# Altium PCB LMAT_AMT_V3.PcbDoc (part 2 of 2)
Units mil, origin at the board's own origin, x right, y up, seen from the top; angles counter-clockwise.
Board outline 1437.01 x 1604.33 mil, 4 copper layers (Top Layer, PWR, GND, Bottom Layer), stack 61.89 mil thick; 106 components, 51 nets, 250 pads, 150 vias.
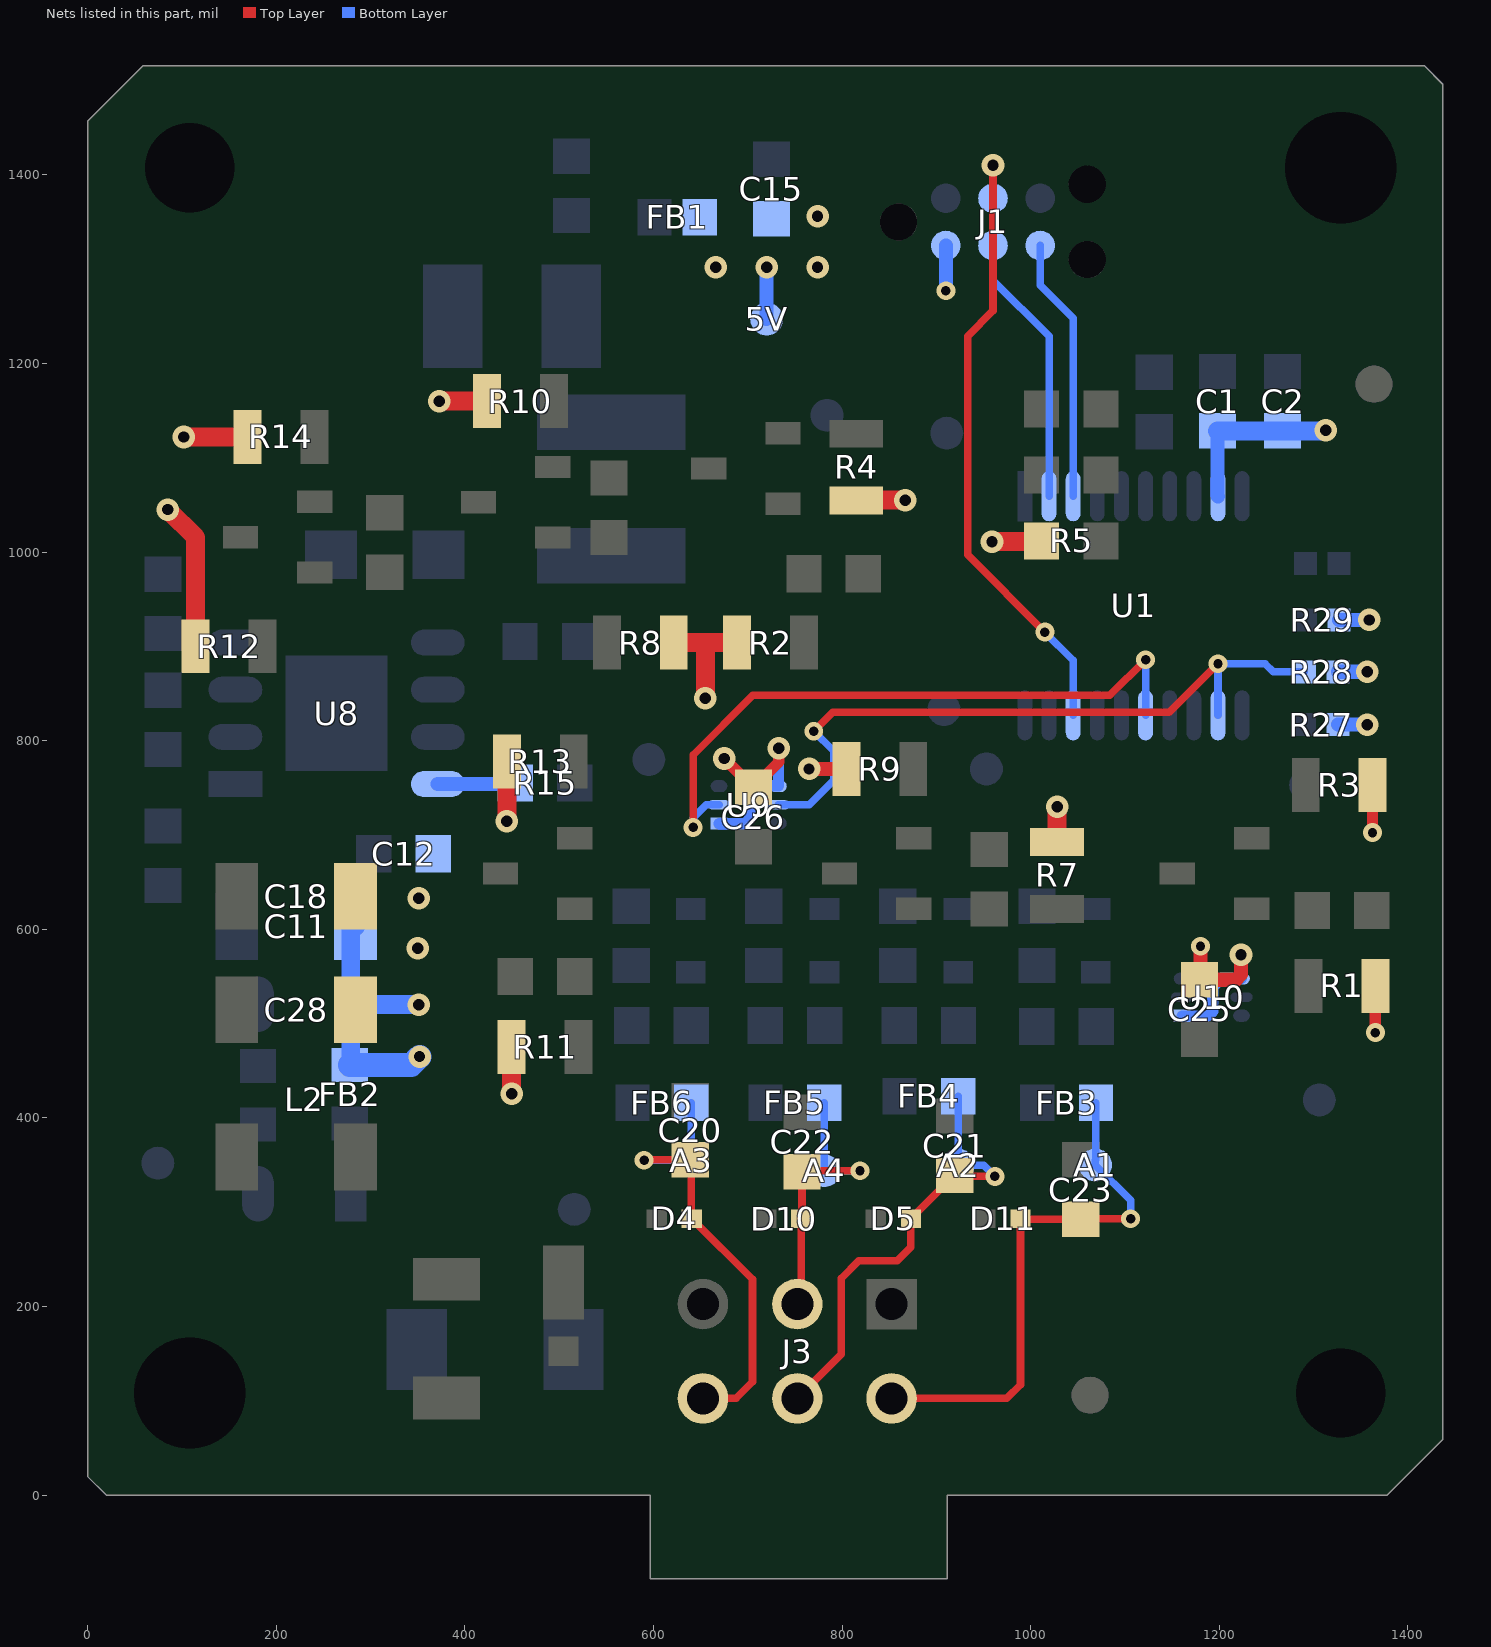
[diagram p4: the nets of this part, all layers, seen from the top]

## Via types
v1: diameter 24, hole 12, Top Layer to Bottom Layer, tented both sides, 128 vias
v2: diameter 20, hole 10, Top Layer to Bottom Layer, tented both sides, 22 vias

## Nets (pads, with @x,y where several pads share a name; then routed paths per layer and width w, separated by ;. In a path a pad name is that pad's centre, name@x,y a point inside that pad or via, vN(x,y) a via of type N, cw(c..) or ccw(c..) an arc to the next point about the centre after c; other vN are vias at no path point) (continued)
S3: R28.1 U1.12 U9.5 | length 738.3
  Top Layer w8: v2(770,810) 790,830 1147,830 v2(1198.57,881.57)
  Bottom Layer w8: U9.5@732.5,731.87 765,731.87 791,757.87 791,789 v2(770,810) ; U1.12@1198.57,826.86 v2(1198.57,881.57) 1248.43,881.57 1257,873 R28.1@1290.28,873
S4: U1.15 U9.2 | length 701.2
  Top Layer w8: v2(642,708) 642,784.77 705.23,848 1084,848 v2(1121.8,885.8)
  Bottom Layer w8: v2(642,708) 642,716.71 642.65,717.35 642,718 656,732 U9.2@669.5,732 ; U1.15@1121.8,826.86 v2(1121.8,885.8)
SIGNAL1: A1.1 C23.2 D11.2 FB3.2 J3.4 | length 574.5
  Top Layer w8: J3.4@852.5,102.5 974.5,102.5 989.18,117.18 D11.2@989.18,293 989.68,292.5 C23.2@1053,292.5 1053.5,293 v2(1106,293)
  Bottom Layer w8: FB3.2@1069.09,416 1069.09,355.44 1068.65,355 A1.1@1068.65,350 1106,312.65 v2(1106,293)
SIGNAL2: A2.1 C21.2 D5.2 FB4.2 J3.5 | length 489.7
  Top Layer w8: J3.5@752.5,102.5 799.27,149.27 799.27,229.69 817.86,248.27 858.27,248.27 873.03,263.03 D5.2@873.03,293 919.02,338.99 C21.2@919.48,338.99 920.47,338 v2(962,338)
  Bottom Layer w8: A2.1@922.91,350 A2.1@923,350 ; FB4.2@923.1,423 923.1,365.19 922.91,365 923,364.91 A2.1@923,350 ; v2(962,338) 950,350 A2.1@923,350
SIGNAL3: A3.1 C20.2 D4.2 FB6.2 J3.6 | length 482.4
  Top Layer w8: v2(590,355) 590.5,355.5 C20.2@639,355.5 ; C20.2@640,355.5 640,293.71 D4.2@640.71,293 705,228.71 705,120 687.5,102.5 J3.6@652.5,102.5
  Bottom Layer w8: v2(590,355) A3.1@640,355 640.1,355.1 FB6.2@640.1,416
SIGNAL4: A4.1 C22.2 D10.2 FB5.2 J3.2 | length 316.7
  Top Layer w8: J3.2@752.5,202.5 756.87,206.87 D10.2@756.87,293 757.5,293.63 C22.2@757.5,342.99 757.5,343.99 v2(819,344)
  Bottom Layer w8: A4.1@781,344 A4.1@781.1,344 ; FB5.2@781.1,416 A4.1@781.1,344 ; v2(819,344) 817,342 815,344 A4.1@781.1,344
SWIM: J1.3 U1.18 | length 675.7
  Top Layer w8: v1(960,1410) 960,1255.74 933,1228.74 933,997 v2(1015,915)
  Bottom Layer w8: J1.3@960,1375 v1(960,1410) ; v2(1015,915) 1045.02,884.98 U1.18@1045.02,826.86
UART_RX: J1.6 U1.3 | length 280.4
  Bottom Layer w8: J1.6@1010,1325 1010,1283 1045.02,1247.98 U1.3@1045.02,1059.14
UART_TX: J1.4 U1.2 | length 290.5
  Bottom Layer w8: J1.4@960,1325 960,1288 1019.43,1228.57 U1.2@1019.43,1059.14
VCC_5V: 5V.1 C1.1 C2.2 C15.1 C25.1 C26.1 FB1.2 J1.2 R1.1 R2.1 R3.1 R4.1 R5.2 R7.1 R8.1 R9.1 R10.1 R11.1 R12.1 R13.1 R14.1 R27.2 R28.2 R29.2 U1.9 U9.1 U9.4 U10.1 U10.4 | length 1650.1
  Top Layer w12: v1(675,781) 705.5,750.5 C26.1@706,750.5 733,777.5 v1(733,792) ; v2(1362.43,702.43) R3.1@1362.43,753 ; v2(1365.43,490.43) R1.1@1365.43,540
  Top Layer w15: v1(765,770) R9.1@804.57,770 ; v2(1180,582) 1180,547.5 C25.1@1179,546.5 1217.5,546.5 1223,552 v1(1223,573)
  Top Layer w20: v1(85,1045) 114.57,1015.43 R12.1@114.57,900 ; v1(102,1122) R14.1@169.57,1122 ; v1(373,1160) R10.1@423.57,1160 ; v1(444.57,714.57) R13.1@444.57,778 R13.1@444.57,794.43 ; v1(449.57,425.43) R11.1@449.57,475 ; R8.1@621.43,904 655,904 ; v1(655,845) 655,904 ; R2.1@688.57,904 655,904 ; R4.1@815,1054.57 815.43,1055 v1(867,1055) ; v1(959,1011) 1010.81,1011 R5.2@1011.5,1011.69 ; R7.1@1028,693 v1(1028,730)
  Bottom Layer w12: U9.1@669.5,712 697,712 702,717 702,743 711,752 U9.4@732.5,752 ; U9.4@732.5,751.87 U9.4@732.5,752 ; v1(733,792) 732.5,791.5 U9.4@732.5,752 ; U10.1@1160.5,508 1188,508 1193,513 1193,539 1202,548 1223.5,548 1223.18,548 1223,548.18 v1(1223,573)
  Bottom Layer w15: 5V.1@720,1247 v1(720,1302) ; v2(910,1277) J1.2@910,1325 ; C1.1@1198,1128.5 1198,1059.71 U1.9@1198.57,1059.14 ; R27.2@1325.72,817 v1(1357,817) ; R28.2@1325.72,873 v1(1357,873) ; R29.2@1326.72,928 v1(1359,928)
  Bottom Layer w20: C1.1@1198,1128.5 C2.2@1267,1128.5 1312.5,1128.5 v1(1313,1129)
  other v1: 666,1302 774,1302 774,1356
VCC_IN: C11.2 C12.1 C18.2 C28.2 FB2.2 L2.5 R15.2 U8.8 | length 378.4
  Bottom Layer w15: U8.8@371.28,754 R15.2@450.5,754
  Bottom Layer w20: FB2.2@278.01,456.1 279.08,457.17 L2.5@279.08,520.39 ; C11.2@283.99,603 279.08,598.09 L2.5@279.08,520.39 ; v1(351,520) 350.61,520.39 L2.5@279.08,520.39
  Bottom Layer w25: FB2.2@278.01,456.1 343.1,456.1 v1(352,465)
  other v1: 350,580 351,633
pads on no net: FID1.0 FID2.0 FID3.0 FID4.0 J1.0 U1.5 U1.6

## Polygon pours and split planes (outlines as drawn)
GND on Bottom Layer "GND_L04_P205" (solid, remove dead copper, pour order 205): 0,19.68 19.68,0 596.46,0 596.46,-88.58 911.42,-88.58 911.42,0 1377.95,0 1437.01,59.05 1437.01,1496.06 1417.32,1515.75 59.06,1515.75 0,1456.69
VCC_IN on Bottom Layer "VCC_IN_L04_P200" (solid, remove dead copper, pour order 200): 241.63,434.37 233,443 233,641 243.32,651.32 300,650 330.59,650 343,662.41 343,772 346,775 406.1,775 470,775 475,770 475,731 472,728 429,728 425,724 425,638.46 380,593.46 380,481 380,458 356.37,434.37
DGND on Bottom Layer "BOTTOM_LAYER-DGND_ALL" (solid, remove dead copper, pour order 204): 40.14,420 365,420 445,340 536.47,340 550,326.47 550,272.83 577.83,245 770,245 785,260 905,260 920,245 920,40.85 885,5.85 885,-50 870,-65 645,-65 625,-45 625,10 610,25 40,25 20,45 20,399.86
NetC17_2 on Bottom Layer "NETC17_2_L04_P199" (solid, remove dead copper, pour order 199): 244,278 283,238.44 443.44,238.44 460,255 460,383.4 421.4,422 255.32,422 244,411.34
VCC_5V on Bottom Layer "VCC_5V_L04_P198" (solid, remove dead copper, pour order 198): 799.47,1279 803,1282.53 803,1375.1 793.1,1385 634,1385 634,1290 645,1279
NetC14_2 on Bottom Layer "NETC14_2_L04_P202" (solid, remove dead copper, pour order 202): 455,1115 470,1100 649.88,1100 670,1120.12 670,1185 615,1240 615,1385 465,1385 455,1375 455,1160
NetC16_2 on Bottom Layer "NETC16_2_L04_P203" (solid, remove dead copper, pour order 203): 687,1050 700,1037 700,907 630.74,837.74 612.74,837.74 335,837.74 335,875 498,875 498,928 484,942 364,942 345,961 345,1038 357,1050
NetD6_2 on Bottom Layer "NETD6_2_L04_P201" (solid, remove dead copper, pour order 201): 450,84 450,69 461,58 587,58 601,72 601,123 617,139 689,139 700,150 700,235 688,247 506,247 450,191
GND on Top Layer "GND_L01_P197" (solid, remove dead copper, pour order 197): 0,19.68 19.68,0 596.46,0 596.46,-88.58 911.42,-88.58 911.42,0 1377.95,0 1437.01,59.05 1437.01,1496.06 1417.32,1515.75 59.06,1515.75 0,1456.69
DGND on Top Layer "TOP_LAYER-DGND_ALL" (solid, remove dead copper, pour order 196): 44.14,424 361,424 445,340 536.47,340 550,326.47 550,272.83 577.83,245 770,245 785,260 905,260 920,245 920,40.85 885,5.85 885,-50 870,-65 645,-65 625,-45 625,10 610,25 40,25 20,45 20,399.86
NetC17_2 on Top Layer "NETC17_2_L01_P195" (solid, remove dead copper, pour order 195): 319,187 310,196 310,268 296,282 249,282 242,289 242,413.96 255.2,427.16 365.84,427.16 448,345 507,345 538,314 538,284 537,195 529,187 405,187 352,187
NetD6_2 on Top Layer "NETD6_2_L01_P193" (solid, remove dead copper, pour order 193): 601,95 601,72 590,61 448,61 444,65 444,156 457,169 589,169 601,157
VCC_IN on Top Layer "VCC_IN_L01_P194" (solid, remove dead copper, pour order 194): 372,456 362,446 263,446 242,467 242,659 242,686.57 246.43,691 366,691 372,685 372,641 372,492
VCC_5V on PWR (split plane): 1409,1495.65 1416.91,1487.74 1416.91,67.38 1369.63,20.1 926.49,20.1 926.49,238.58 926.2,241.52 925.34,244.35 923.95,246.96 922.08,249.24 904.66,266.66 902.37,268.53 899.77,269.93 896.94,270.78 894,271.07 545.24,271.07 385.66,430.66 383.37,432.53 380.77,433.93 377.94,434.78 375,435.07 20.1,435.07 20.1,1448.37 67.38,1495.65
DGND on PWR (split plane): 528.34,245.34 530.63,243.47 533.23,242.07 536.06,241.22 539,240.93 887.76,240.93 896.35,232.34 896.35,13.16 894.71,11.17 892.85,7.69 892.05,5.06 891.71,3.92 891.32,0 891.32,-68.49 616.55,-68.49 616.55,0 616.17,3.92 615.82,5.06 615.02,7.69 613.17,11.17 610.67,14.21 607.62,16.71 604.15,18.57 601.52,19.36 600.38,19.71 596.46,20.1 28.01,20.1 20.1,28.01 20.1,404.93 368.76,404.93
GND on GND (split plane): 1409,1495.65 1416.91,1487.74 1416.91,67.38 1369.63,20.1 926.49,20.1 926.49,238.58 926.2,241.52 925.34,244.35 923.95,246.96 922.08,249.24 904.66,266.66 902.37,268.53 899.77,269.93 896.94,270.78 894,271.07 545.24,271.07 385.66,430.66 383.37,432.53 380.77,433.93 377.94,434.78 375,435.07 20.1,435.07 20.1,1448.37 67.38,1495.65
DGND on GND (split plane): 528.34,245.34 530.63,243.47 533.23,242.07 536.06,241.22 539,240.93 887.76,240.93 896.35,232.34 896.35,13.16 894.71,11.17 892.85,7.69 892.05,5.06 891.71,3.92 891.32,0 891.32,-68.49 616.55,-68.49 616.55,0 616.17,3.92 615.82,5.06 615.02,7.69 613.17,11.17 610.67,14.21 607.62,16.71 604.15,18.57 601.52,19.36 600.38,19.71 596.46,20.1 28.01,20.1 20.1,28.01 20.1,404.93 368.76,404.93

## Keep-outs
Keep-Out Layer:
  lines w5: 0,222.5 cw(c108.21,108.21) 222.5,0 ; 0,1293 ccw(c108.27,1407.48) 222.39,1516.12 ; 1214.27,1515.75 ccw(c1328.52,1407.26) 1437,1293 ; 1215,0 cw(c1328.54,108.72) 1437.01,222.5 ; 59.06,1515.75 1417.32,1515.75 1437.01,1496.06 1437.01,59.05 1377.95,0 911.42,0 911.42,-88.58 596.46,-88.58 596.46,0 19.68,0 0,19.68 0,1456.69 59.06,1515.75 ; 59.06,1515.75 59.06,1515.75
  text "'.Layer_Name'" at 15860,-9491 h150

## Other copper
Top Layer:
  pour cut-out: 379.79,449 379.79,420 392.5,420 392.5,449
  pour cut-out: 1037.79,1024.9 1037.79,1011.9 1049.61,1011.9 1049.61,1024.9
  pour cut-out: 1035.79,1096.9 1035.79,1083.9 1047.61,1083.9 1047.61,1096.9
  pour cut-out: 1036.79,1165.9 1036.79,1152.9 1048.61,1152.9 1048.61,1165.9
  pour cut-out: 223.33,998.45 258,998.45 258,1035.55 222.74,1035.55
  pour cut-out: 218.89,478.68 218.9,369.8 233.82,369.8 233.81,478.68
  pour cut-out: 660.84,700.2 676.32,700.2 676.32,713.13 660.84,713.13
  pour cut-out: 555,271.57 656.5,271.57 656.5,222.43 555,222.43
  pour cut-out: 918.47,281.07 940,281.07 940,259.42 918.47,259.42
  pour cut-out: 776.24,270 825,270 825,244.52 776.24,244.52
  pour cut-out: 690,264.74 738.76,264.74 738.76,239.25 690,239.26
  pour cut-out: 1210,534.74 1280,534.73 1280,509.25 1210,509.26
  pour cut-out: 416.37,167.9 423.61,167.9 423.61,135.28 416.37,135.28
  text "'.Layer_Name'" at 15625,-9501 h150
Bottom Layer:
  pour cut-out: 232.83,654 232.83,637.48 276,637.48 276,654
  pour cut-out: 190.84,566.9 190.84,557.48 219,557.48 219,566.9
  pour cut-out: 1333,1093 1341,1093 1341,1070 1333,1070
  pour cut-out: 217,445 248.58,445 248.58,362 217,362
  pour cut-out: 1243,789 1383,789 1383,916 1243,916
  pour cut-out: 394.38,459.12 404,449.5 404,422.5 376,422.5 376,451.5
  pour cut-out: 602.7,758.96 602.7,733.15 621,733.15 621,758.96
  pour cut-out: 480.39,333 546,333 546,259.42 480.39,259.42
  pour cut-out: 1153,1175 1245,1175 1245,1152 1153,1152
  pour cut-out: 566,468 658,468 658,445 566,445
  pour cut-out: 709,468 801,468 801,445 709,445
  pour cut-out: 850,472 942,472 942,449 850,449
  pour cut-out: 1003,467 1099,467 1099,384 1003.01,384
  text "'.Layer_Name'" at 15652,-9500 h150
PWR (plane layer: these items are gaps in the copper):
  pour cut-out: 717.44,792 ccw(c733,792) 733,776.44 ccw(c733,792) 748.56,792 ccw(c733,792) 733,807.56 ccw(c733,792)
  pour cut-out: 1206.82,573.05 ccw(c1222.37,573.05) 1222.37,557.49 ccw(c1222.37,573.05) 1237.93,573.05 ccw(c1222.37,573.05) 1222.37,588.6 ccw(c1222.37,573.05)
  lines w30: 0,420 375,420 539,256 894,256 911.42,238.58 911.42,0
  text "'.Layer_Name'" at 15653,-9501 h150
GND (plane layer: these items are gaps in the copper):
  lines w30: 0,420 375,420 539,256 894,256 911.42,238.58 911.42,0
  lines w40: 1345,1425 1345,1430
  text "'.Layer_Name'" at 15640,-9503 h150

## Silkscreen, mask and mechanical layers (free items; w line width, h text height)
Top Overlay:
  text "LMAT_AMT_V3" at 250,1329 h80
  text "'.Layer_Name'" at 15755,-9491 h150
Bottom Overlay:
  lines w8: 809,389 815,383 815,376.54 ; 948,392 954,386 954,381 ; 1105,390 1112,383 1112,377
  text "PROG_CONN" at 1085,1177 h40
  text "'.Layer_Name'" at 15795,-9476 h150
Top Paste:
  text "'.Layer_Name'" at 15940,-9481 h150
Bottom Paste:
  text "'.Layer_Name'" at 15940,-9501 h150
Top Solder:
  text "'.Layer_Name'" at 16030,-9481 h150
Bottom solder:
  region: 1239.09,560 1208,560 1208,498 1239.09,498
  region: 1176,558 1144,558 1144,499 1176,499
  rectangle: 716,701 748,761.18
  rectangle: 652,701 684.87,761
Drill Guide:
  text "'.Layer_Name'" at 16070,-9496 h150
Fabrication Notes:
  drawing of 347 lines, arcs and shapes, not listed
  text "Layer" at 5132.5,6345.5 h60
  text "Name" at 5542.41,6345.5 h60
  text "Material" at 6472.16,6345.5 h60
  text "Thickness" at 7331.92,6345.5 h60
  text "Constant" at 7981.76,6345.5 h60
  text "Board Layer Stack" at 8551.62,6345.5 h60
  text "1" at 5132.5,6225.5 h60
  text "Top Overlay" at 5542.41,6225.5 h60
  text "2" at 5132.5,6105.5 h60
  text "Top Solder" at 5542.41,6105.5 h60
  text "Solder Resist" at 6472.16,6105.5 h60
  text "0.020mm" at 7331.92,6105.5 h60
  text "3.5" at 7981.76,6105.5 h60
  text "3" at 5132.5,5985.5 h60
  text "Top Layer" at 5542.41,5985.5 h60
  text "Copper" at 6472.16,5985.5 h60
  text "0.035mm" at 7331.92,5985.5 h60
  text "4" at 5132.5,5865.5 h60
  text "Dielectric 1" at 5542.41,5865.5 h60
  text "PP-006" at 6472.16,5865.5 h60
  text "0.128mm" at 7331.92,5865.5 h60
  text "4.2" at 7981.76,5865.5 h60
  text "5" at 5132.5,5745.5 h60
  text "Dielectric 2" at 5542.41,5745.5 h60
  text "0.088mm" at 7331.92,5745.5 h60
  text "4.2" at 7981.76,5745.5 h60
  text "6" at 5132.5,5625.5 h60
  text "PWR" at 5542.41,5625.5 h60
  text "Copper" at 6472.16,5625.5 h60
  text "0.035mm" at 7331.92,5625.5 h60
  text "7" at 5132.5,5505.5 h60
  text "Dielectric 3" at 5542.41,5505.5 h60
  text "FR-4" at 6472.16,5505.5 h60
  text "1.000mm" at 7331.92,5505.5 h60
  text "4.2" at 7981.76,5505.5 h60
  text "8" at 5132.5,5385.5 h60
  text "GND" at 5542.41,5385.5 h60
  text "Copper" at 6472.16,5385.5 h60
  text "0.035mm" at 7331.92,5385.5 h60
  text "9" at 5132.5,5265.5 h60
  text "Dielectric 4" at 5542.41,5265.5 h60
  text "PP-006" at 6472.16,5265.5 h60
  text "0.088mm" at 7331.92,5265.5 h60
  text "4.2" at 7981.76,5265.5 h60
  text "10" at 5132.5,5145.5 h60
  text "Dielectric 5" at 5542.41,5145.5 h60
  text "0.128mm" at 7331.92,5145.5 h60
  text "4.2" at 7981.76,5145.5 h60
  text "11" at 5132.5,5025.5 h60
  text "Bottom Layer" at 5542.41,5025.5 h60
  text "Copper" at 6472.16,5025.5 h60
  text "0.035mm" at 7331.92,5025.5 h60
  text "12" at 5132.5,4905.5 h60
  text "Bottom solder" at 5542.41,4905.5 h60
  text "Solder Resist" at 6472.16,4905.5 h60
  text "0.020mm" at 7331.92,4905.5 h60
  text "3.5" at 7981.76,4905.5 h60
  text "13" at 5132.5,4785.5 h60
  text "Bottom Overlay" at 5542.41,4785.5 h60
  text "Total Pcb Thickness = 1.612MM  +/- 10%" at 5255.55,4296.24 h100
  text "Finished cu Thickness: 1 OZ" at 5656.3,4045.3 h100
  text "FABRICATION NOTES:" at -10970.2,697.07 h80
  text "1. LATEST VERSION OF ALL REFERENCED IPC SPECIFICATIONS TO BE USED." at -10970.2,497.07 h70
  text "2. ALL MULTILAYER PC BOARDS MUST BE PRODUCED IN ACCORDANCE IPC-A-600, CLASS 2." at -10970.2,297.14 h70
  text "3. INSPECT ALL MULTILAYER PC BOARDS IN ACCORDANCE WITH IPC-6012, CLASS 2." at -10970.2,97.14 h70
  text "4. MATERIAL:  THIN LAMINATE, FR4 COPPER CLAD 1 OZ PER LAYER" at -10970.2,-102.86 h70
  text "1.6 MM +/-10% THICK, COLOR GREEN," at -10772.2,-237.93 h70
  text "MINIMUM CTI (PER IEC 60112 USING SOLUTION A) = 175." at -10772.2,-387.93 h70
  text "5. FABRICATE BOARDS USING THE GERBER FILES CONTAINED IN FABRICATION FOLDER." at -10970.2,-602.86 h70
  text "6. DRILL DATA ARE CONTAINED IN THE FABRICATION FOLDER." at -10970.2,-812.86 h70
  text "7. ALL HOLE DIAMETERS MUST BE PER DRILL CHART +/-0.003 INCHES TOLERANCE," at -10970.2,-1017.86 h70
  text "UNLESS OTHERWISE SPECIFIED." at -10770.2,-1164.93 h70
  text "8. PLATED-THRU HOLES TO HAVE COPPER WALL THICKNESS NOT LESS THAN 0.001 INCHES." at -10970.2,-1367.86 h70
  text "THICKNESS TO BE DETERMINED BY IPC-6012, CLASS 2." at -10790.2,-1512.93 h70
  text "9. SURFACE FINISH PROCESS MUST BE HAL LEAD-FREE" at -10970.2,-1717.86 h70
  text "10. SILKSCREEN BOTH SIDES WITH WHITE EPOXY NON-CONDUCTIVE INK." at -10970.2,-1892.93 h70
  text "SILKSCREEN MAY BE TRIMMED OFF ANY SOLDERED ENTITY." at -10714.2,-2042.93 h70
  text "11. SOLDER MASK BOTH SIDES WITH LIQUID PHOTO IMAGEABLE SOLDER MASK (LPI)," at -10970.2,-2242.93 h70
  text "MEETING IPC-SM-840, CLASS 2, HIGH PERFORMANCE SPECIFICATIONS." at -10720.2,-2380.93 h70
  text "FINISH: SOLDER MASK OVER BARE COPPER (SMOBC)." at -10720.2,-2535.93 h70
  text "12. WARP AND TWIST SHALL BE LESS THAN 0.0075 INCH PER INCH." at -10970.2,-2752.93 h70
  text "INSPECT PER IPC-TM-650, 2.4.22." at -10714.2,-2894.93 h70
  text "13. ALL BOARDS MUST BE DATE CODED USING A FOUR DIGIT CODE," at -10970.2,-3087.93 h70
  text "YEAR FOLLOWED BY WEEK (e.g. 0449 = 49TH WEEK OF 2004)." at -10714.2,-3229.93 h70
  text "14. ALL DIMENSIONS AND HOLE DIAMETERS APPLY TO THE FINISHED BOARD." at -10970.2,-3442.93 h70
  text "15. PADS MUST BE FINISHED TO WITHIN +/-0.0015 INCHES OF THE MINOR DIMENSION (PAD WIDTH)" at -10970.2,-3637.93 h70
  text "AND +/-0.002 INCHES OF THE MAJOR DIMENSION (PAD LENGTH)." at -10711.2,-3789.93 h70
  text "16. FIDUCIALS MUST BE FREE OF ANY MARKINGS." at -10970.2,-3972.93 h70
  text "17. BARE BOARD TO BE ELECTRICALLY TESTED IN ACCORDANCE WITH IPC-ET-652 AND MARKED AS TESTED." at -10970.2,-4177.93 h70
  text "18. BOARDS SHALL BE UL-RECOGNIZED AND UL-MARKED. UL FIRE RETARDANT RATING 94V-0 OR HIGHER." at -10970.2,-4377.93 h70
  text "19. ROHS: ALL MATERIALS MUST BE COMPLIANT WITH THE ROHS DIRECTIVE." at -10970.2,-4577.93 h70
  text "20. EACH PCB MUST BE INDIVIDUALLY BAGGED." at -10995,-4790 h70
  text "21. ALL VIA MUST BE TENTED." at -10990,-5010 h70
Board Outlines:
  the board outline again, w5
  text "'.Layer_Name'" at 15648,-9508 h150
Dimensions:
  lines w5: 59.06,1515.75 59.06,1515.75 ; 59.06,1515.75 0,1456.69 0,19.68 19.68,0 596.46,0 596.46,-88.58 911.42,-88.58 911.42,0 1377.95,0 1437.01,59.05 1437.01,1496.06 1417.32,1515.75 59.06,1515.75
  lines w8: 0,-50 0,7.18
  text "'.Layer_Name'" at 15651,-9503 h150
Assembly Notes:
  text "ASSEMBLY NOTES:" at -11451.14,5359.58 h80
  text "CAUTION :" at -11457.14,5212.99 h80
  text "COMPONENTS ARE SUBJECT TO DAMAGE BY STATIC ELECTRICITY." at -10855.14,5204.99 h80
  text "1. SERIALIZATION PER #900-984." at -10871.14,5053.99 h80
  text "2.  REFER BOM FOR COMPONENT PLACEMENT." at -10889.14,4868.99 h80
  text "3. MARK WITH SERIAL NUMBER ON A STICKER PASTED." at -10892.14,4679.99 h80
  text "4.  LABELS SHALL NOT TO BE PLACED OVER EXPOSED COPPER." at -10886.14,4493.33 h80
  text "5. MANUFACTURE PER TS 16469 STANDARD." at -10881.14,4326.99 h80
  text "6. BOARD MUST BE CLEANED EVEN IF USING NO CLEAN FLUX." at -10881.14,4161.99 h80
  text "7.  ASSEMBLY SHALL BE ELECTRICALLY TESTED." at -10876.14,3996.99 h80
  text "8.  SOLDER AND ASSEMBLE AS PER INDUSTRY WORKMANSHIP STANDARDS." at -10876.14,3826.99 h80
  text "9. ASSEMBLY MUST BE ROHS COMPLIANT." at -10886.14,3661.99 h80
1MM:
  lines w5: -13895.07,-5183.7 -13595.07,-5183.7 ; -13895.07,-183.7 -13595.07,-183.7 ; -13895.07,4816.3 -13595.07,4816.3 ; -9895.07,-10183.7 -9895.07,-9883.7 ; -9895.07,9516.3 -9895.07,9816.3 ; -5895.07,-10183.7 -5895.07,-9883.7 ; -5895.07,9516.3 -5895.07,9816.3 ; -1895.07,-10183.7 -1895.07,-9883.7 ; -1895.07,9516.3 -1895.07,9816.3 ; 39.37,1439.69 39.37,78.74 78.74,39.37 629.92,39.37 629.92,-39.37 885,-39.37 885,39.37 1377.95,39.37 1397.64,59.06 1397.64,1452.36 1373.62,1476.38 80.87,1476.38 75.55,1476.38 39.37,1440.2 ; 2104.93,-10183.7 2104.93,-9883.7 ; 2104.93,9516.3 2104.93,9816.3 ; 6104.93,-10183.7 6104.93,-9883.7 ; 6104.93,9516.3 6104.93,9816.3 ; 10104.93,-10183.7 10104.93,-9883.7 ; 10104.93,9516.3 10104.93,9816.3 ; 11904.93,-9883.7 13304.93,-9883.7 17804.93,-9883.7 ; 14104.93,-10183.7 14104.93,-9883.7 ; 14104.93,9516.3 14104.93,9816.3 ; 17804.93,-8683.7 17804.93,-9883.7 ; 17804.93,-5183.7 18104.93,-5183.7 ; 17804.93,-183.7 18104.93,-183.7 ; 17804.93,4816.3 18104.93,4816.3 ; 17804.93,-9883.7 17804.93,9516.3 -13595.07,9516.3 -13595.07,-9883.7 17804.93,-9883.7 ; -13895.07,-10183.7 18104.93,-10183.7 18104.93,9816.3 -13895.07,9816.3 -13895.07,-10183.7
  lines w10: 10500.93,-9879.8 11800.93,-9879.8 17800.93,-9879.8 17800.93,-8379.8 ; 10500.93,-8010.15 17795.93,-8010.15 ; 11800.93,-9579.8 14200.93,-9579.8 17800.93,-9579.8 ; 11800.93,-9279.8 14200.93,-9279.8 17795.65,-9279.8 ; 11800.93,-8979.8 14200.93,-8979.8 17800.93,-8979.8 ; 11800.93,-8679.8 14200.93,-8679.8 ; 12800.93,-9879.8 12800.93,-9579.8 ; 13200.93,-9279.8 13200.93,-8379.8 ; 14200.93,-9879.8 14200.93,-8379.8 ; 15100.93,-9879.8 15100.93,-9579.8 ; 15500.93,-9879.8 15500.93,-9579.8 ; 17400.93,-9879.8 17400.93,-9579.8 ; 10500.93,-8379.8 11800.93,-8379.8 ; 10500.93,-8379.8 10500.93,-9881.7 11800.93,-9881.7 11800.93,-8379.8 ; 10500.93,-8379.8 10500.93,-7600.15 17800.93,-7600.15 17800.93,-8379.8 ; 11800.93,-8379.8 17800.93,-8379.8
  text "1" at -11913.07,9626.3 h70
  text "2" at -7918.07,9626.3 h70
  text "3" at -3923.07,9626.3 h70
  text "4" at 77.94,9626.3 h70
  text "5" at 4076.27,9626.3 h70
  text "6" at 8074.61,9626.3 h70
  text "7" at 12076.27,9626.3 h70
  text "8" at 16071.27,9626.3 h70
  text "A" at -13770.07,7228.3 h70
  text "A" at 17929.93,7228.3 h70
  text "B" at -13770.07,2228.3 h70
  text "B" at 17929.93,2228.3 h70
  text "C" at -13770.07,-2771.7 h70
  text "C" at 17929.93,-2771.7 h70
  text "D" at -13770.07,-7771.7 h70
  text "D" at 17929.93,-7771.7 h70
  text "THE INFORMATION CONTAINED IN THIS DOCUMENT IS PROPRIETARY OF CUSTOMER." at 17641.19,-7784.52 h75
  text "ANY PRODUCTION IN PART OR WHOLE WITHOUT PRIOR WRITTEN AUTHORIZATION OF CUSTOMER IS PROHIBITED." at 17649.33,-7938.02 h75
  text "CUSTOMER:  LUMAX" at 16081.33,-8251.02 h100
  text "DATE" at 14105.93,-8484.8 h45
  text "Drawn By: Harshavardhan K" at 13115.93,-8489.8 h45
  text "UNLESS OTHERWISE" at 11756.33,-8561.02 h70
  text "Design Partner:" at 17615.93,-8610.8 h100
  text "'.Print_Date'" at 14120.93,-8634.8 h70
  text "SPECIFIED:" at 11730.93,-8669.8 h70
  text "DATE" at 14110.93,-8784.8 h45
  text "ALL DIMENSIONS ARE" at 11766.33,-8796.02 h70
  text "Designed By : Vijendra N" at 13113.93,-8799.8 h45
  text "EmbDes Technologies Pvt. Ltd." at 17615.93,-8829.52 h100
  text "'.Print_Date'" at 14120.93,-8934.8 h70
  text "IN INCHES" at 11708.93,-8937.8 h70
  text "DATE" at 14120.93,-9074.8 h45
  text "Checked By : Uday Kumar K" at 13113.93,-9079.8 h45
  text "TOLERANCES" at 11658.93,-9087.8 h70
  text "PROJECT NAME:    LMAT_AMT_V2" at 17615.93,-9177.02 h80
  text "(DECIMAL):" at 11708.93,-9187.8 h70
  text "'.Print_Date'" at 14120.93,-9224.8 h70
  text ".X +/-0.1" at 11708.93,-9337.8 h70
  text "REF ID" at 14123.93,-9396.02 h45
  text ".XX +/-0.01" at 11701.33,-9446.02 h70
  text "'.Layer_Name'" at 15045,-9476 h150
  text "LAYER NAME:" at 17615.93,-9486.02 h80
  text "ASSY BOTTOM" at 16642.99,-9524.07 h150
  text ".XXX +/-0.005" at 11696.33,-9556.02 h70
  text "Scale" at 12711.33,-9681.02 h45
  text "Size" at 15385.93,-9684.8 h45
  text "REV" at 17685.93,-9684.8 h45
  text "ANGLES +/-0.5" at 11558.93,-9687.8 h70
  text "Sheet     of" at 14955.93,-9689.8 h45
  text "DWG NO" at 17336.33,-9691.02 h45
  text "DO NOT SCALE" at 14036.33,-9716.02 h70
  text "1:1" at 12385.93,-9784.8 h70
  text "1" at 14497.93,-9799.8 h70
  text "1" at 14891.33,-9801.02 h70
  text "D" at 15309.93,-9808.7 h90
  text "1.0" at 17690.93,-9809.8 h70
  text "DRAWING" at 14036.33,-9841.02 h70
  text "1" at -11913.07,-10068.7 h70
  text "2" at -7918.07,-10068.7 h70
  text "3" at -3923.07,-10068.7 h70
  text "4" at 77.94,-10068.7 h70
  text "5" at 4076.27,-10068.7 h70
  text "6" at 8074.61,-10068.7 h70
  text "7" at 12076.27,-10068.7 h70
  text "8" at 16071.27,-10068.7 h70
Bottom Assembly:
  text "'.Layer_Name'" at 15655,-9486 h40
Template:
  lines w5: -13860.39,-5193.39 -13560.39,-5193.39 ; -13860.39,-193.39 -13560.39,-193.39 ; -13860.39,4806.61 -13560.39,4806.61 ; -9860.39,-10193.39 -9860.39,-9893.39 ; -9860.39,9506.61 -9860.39,9806.61 ; -5860.39,-10193.39 -5860.39,-9893.39 ; -5860.39,9506.61 -5860.39,9806.61 ; -1860.39,-10193.39 -1860.39,-9893.39 ; -1860.39,9506.61 -1860.39,9806.61 ; 2139.61,-10193.39 2139.61,-9893.39 ; 2139.61,9506.61 2139.61,9806.61 ; 6139.61,-10193.39 6139.61,-9893.39 ; 6139.61,9506.61 6139.61,9806.61 ; 10139.61,-10193.39 10139.61,-9893.39 ; 10139.61,9506.61 10139.61,9806.61 ; 11939.61,-9893.39 13339.61,-9893.39 17839.61,-9893.39 ; 14139.61,-10193.39 14139.61,-9893.39 ; 14139.61,9506.61 14139.61,9806.61 ; 17839.61,-8693.39 17839.61,-9893.39 ; 17839.61,-5193.39 18139.61,-5193.39 ; 17839.61,-193.39 18139.61,-193.39 ; 17839.61,4806.61 18139.61,4806.61 ; 17839.61,-9893.39 17839.61,9506.61 -13560.39,9506.61 -13560.39,-9893.39 17839.61,-9893.39 ; -13860.39,-10193.39 -13860.39,9806.61 18139.61,9806.61 18139.61,-10193.39 -13860.39,-10193.39
  lines w10: 10534.51,-9891.39 11834.51,-9891.39 ; 10534.51,-8021.73 17829.51,-8021.73 ; 11829.51,-9891.39 10534.91,-9891.39 10534.51,-9890.98 10534.51,-8391.39 ; 11834.51,-9591.39 14234.51,-9591.39 17834.51,-9591.39 ; 11834.51,-9291.39 14234.51,-9291.39 17829.23,-9291.39 ; 11834.51,-8991.39 14234.51,-8991.39 17834.51,-8991.39 ; 11834.51,-8691.39 14234.51,-8691.39 ; 12834.51,-9891.39 12834.51,-9591.39 ; 13234.51,-9291.39 13234.51,-8391.39 ; 14234.51,-9891.39 14234.51,-8391.39 ; 15134.51,-9891.39 15134.51,-9591.39 ; 15534.51,-9891.39 15534.51,-9591.39 ; 17434.51,-9891.39 17434.51,-9591.39 ; 10534.51,-8391.39 11834.51,-8391.39 ; 10534.51,-8391.39 10534.51,-7611.73 17834.51,-7611.73 17834.51,-8391.39 ; 11834.51,-9891.39 11834.51,-8391.39 ; 11834.51,-9891.39 17834.51,-9891.39 17834.51,-8391.39 ; 11834.51,-8391.39 17834.51,-8391.39
  text "1" at -11878.39,9616.61 h70
  text "2" at -7883.39,9616.61 h70
  text "3" at -3888.39,9616.61 h70
  text "4" at 112.62,9616.61 h70
  text "5" at 4110.96,9616.61 h70
  text "6" at 8109.29,9616.61 h70
  text "7" at 12110.96,9616.61 h70
  text "8" at 16105.96,9616.61 h70
  text "A" at -13735.39,7218.61 h70
  text "A" at 17964.61,7218.61 h70
  text "B" at -13735.39,2218.61 h70
  text "B" at 17964.61,2218.61 h70
  text "C" at -13735.39,-2781.39 h70
  text "C" at 17964.61,-2781.39 h70
  text "THE INFORMATION CONTAINED IN THIS DOCUMENT IS PROPRIETARY OF CUSTOMER." at 10579.77,-7776.1 h75
  text "D" at -13735.39,-7781.39 h70
  text "D" at 17964.61,-7781.39 h70
  text "ANY PRODUCTION IN PART OR WHOLE WITHOUT PRIOR WRITTEN AUTHORIZATION OF CUSTOMER IS PROHIBITED." at 10587.91,-7929.6 h75
  text "CUSTOMER:  LUMAX" at 12426.77,-8241.1 h100
  text "Drawn By : Harshavardhan K" at 11934.51,-8491.39 h45
  text "DATE" at 13334.51,-8491.39 h45
  text "UNLESS OTHERWISE" at 10634.51,-8591.39 h70
  text "Design Partner:" at 14324.51,-8596.1 h100
  text "'.Print_Date'" at 13334.51,-8641.39 h70
  text "SPECIFIED:" at 10884.51,-8691.39 h70
  text "Designed By : Aravinth D" at 11916.51,-8791.39 h45
  text "DATE" at 13334.51,-8791.39 h45
  text "Embdes Engineering Solutions Pvt Ltd" at 14324.51,-8813.39 h100
  text "ALL DIMENSIONS ARE" at 10584.51,-8841.39 h70
  text "'.Print_Date'" at 13334.51,-8941.39 h70
  text "IN INCHES" at 10862.51,-8959.39 h70
  text "Checked By : Uday Kumar K" at 11916.51,-9091.39 h45
  text "DATE" at 13334.51,-9091.39 h45
  text "TOLERANCES" at 10812.51,-9109.39 h70
  text "PROJECT NAME:    LMAT_AMT_V3" at 14324.51,-9188.6 h80
  text "(DECIMAL):" at 10862.51,-9209.39 h70
  text "'.Print_Date'" at 13334.51,-9241.39 h70
  text ".X +/-0.1" at 10862.51,-9359.39 h70
  text "REF ID" at 11934.51,-9391.39 h45
  text ".XX +/-0.01" at 10812.51,-9459.39 h70
  text "LAYER NAME:" at 14324.51,-9478.6 h80
  text ".XXX +/-0.005" at 10712.51,-9559.39 h70
  text "Scale" at 11934.51,-9691.39 h45
  text "Sheet     of" at 14334.51,-9691.39 h45
  text "Size" at 15234.51,-9691.39 h45
  text "DWG NO" at 15634.51,-9691.39 h45
  text "REV" at 17534.51,-9691.39 h45
  text "ANGLES +/-0.5" at 10712.51,-9709.39 h70
  text "DO NOT SCALE" at 13084.51,-9741.39 h70
  text "1:1" at 12234.51,-9791.39 h70
  text "1" at 14434.51,-9811.39 h70
  text "1" at 14934.51,-9816.39 h70
  text "D" at 15284.51,-9816.39 h90
  text "1.0" at 17539.51,-9816.39 h70
  text "DRAWING" at 13234.51,-9841.39 h70
  text "1" at -11878.39,-10078.39 h70
  text "2" at -7883.39,-10078.39 h70
  text "3" at -3888.39,-10078.39 h70
  text "4" at 112.62,-10078.39 h70
  text "5" at 4110.96,-10078.39 h70
  text "6" at 8109.29,-10078.39 h70
  text "7" at 12110.96,-10078.39 h70
  text "8" at 16105.96,-10078.39 h70
Drill Drawing:
  circle w10: c-4339.38,5490.83 r33.33
  lines w10: -4372.71,5307.5 -4339.38,5324.17 -4306.04,5307.5 -4322.71,5340.83 -4306.04,5374.17 -4339.38,5357.5 -4372.71,5374.17 -4356.04,5340.83 -4372.71,5307.5 ; -4372.71,5624.17 -4356.04,5624.17 -4356.04,5607.5 -4322.71,5607.5 -4322.71,5624.17 -4306.04,5624.17 -4306.04,5657.5 -4322.71,5657.5 -4322.71,5674.17 -4356.04,5674.17 -4356.04,5657.5 -4372.71,5657.5 -4372.71,5624.17 ; -4372.71,5757.5 -4372.71,5774.17 -4356.04,5790.83 -4372.71,5807.5 -4372.71,5824.17 -4356.04,5824.17 -4339.38,5807.5 -4322.71,5824.17 -4306.04,5824.17 -4306.04,5807.5 -4322.71,5790.83 -4306.04,5774.17 -4306.04,5757.5 -4322.71,5757.5 -4339.38,5774.17 -4356.04,5757.5 -4372.71,5757.5 ; -4372.71,5974.17 -4306.04,5974.17 -4339.38,5907.5 -4372.71,5974.17 ; -4372.71,6057.5 -4306.04,6057.5 -4306.04,6124.17 -4372.71,6124.17 -4372.71,6057.5
  lines w15: -4432.5,5262.5 2687.56,5262.5 ; -4432.5,6162.5 2687.56,6162.5 ; -3881.62,5112.5 -3881.62,6312.5 ; -3291.78,5112.5 -3291.78,6312.5 ; -2172.11,5112.5 -2172.11,6312.5 ; -1666.23,5112.5 -1666.23,6312.5 ; -932.43,5112.5 -932.43,6312.5 ; 567.12,5112.5 567.12,6312.5 ; 1156.97,5112.5 1156.97,6312.5 ; 1902.77,5112.5 1902.77,6312.5 ; -4432.5,5112.5 2687.56,5112.5 2687.56,6312.5 -4432.5,6312.5 -4432.5,5112.5
  text "Symbol" at -4342.5,6207.5 h72
  text "Count" at -3836.62,6207.5 h72
  text "Hole Size" at -3246.78,6207.5 h72
  text "Plated" at -2127.11,6207.5 h72
  text "Hole Type" at -1621.23,6207.5 h72
  text "Drill Layer Pair" at -887.43,6207.5 h72
  text "Via/Pad" at 612.12,6207.5 h72
  text "Pad Shape" at 1201.97,6207.5 h72
  text "Template" at 1947.77,6207.5 h72
  text "2" at -3836.62,6057.5 h60
  text "94.49mil (2.400mm)" at -3246.78,6057.5 h60
  text "NPTH" at -2127.11,6057.5 h60
  text "Round" at -1621.23,6057.5 h60
  text "Top Layer - Bottom Layer" at -887.43,6057.5 h60
  text "Pad" at 612.12,6057.5 h60
  text "Rounded" at 1201.97,6057.5 h60
  text "c10hn240" at 1947.77,6057.5 h60
  text "2" at -3836.62,5907.5 h60
  text "118.11mil (3.000mm)" at -3246.78,5907.5 h60
  text "NPTH" at -2127.11,5907.5 h60
  text "Round" at -1621.23,5907.5 h60
  text "Top Layer - Bottom Layer" at -887.43,5907.5 h60
  text "Pad" at 612.12,5907.5 h60
  text "Rounded" at 1201.97,5907.5 h60
  text "c10hn300" at 1947.77,5907.5 h60
  text "3" at -3836.62,5757.5 h60
  text "39.37mil (1.000mm)" at -3246.78,5757.5 h60
  text "NPTH" at -2127.11,5757.5 h60
  text "Round" at -1621.23,5757.5 h60
  text "Top Layer - Bottom Layer" at -887.43,5757.5 h60
  text "Pad" at 612.12,5757.5 h60
  text "Rounded" at 1201.97,5757.5 h60
  text "c100hn100" at 1947.77,5757.5 h60
  text "6" at -3836.62,5607.5 h60
  text "33.86mil (0.860mm)" at -3246.78,5607.5 h60
  text "PTH" at -2127.11,5607.5 h60
  text "Round" at -1621.23,5607.5 h60
  text "Top Layer - Bottom Layer" at -887.43,5607.5 h60
  text "Pad" at 612.12,5607.5 h60
  text "(Mixed)" at 1201.97,5607.5 h60
  text "(Mixed)" at 1947.77,5607.5 h60
  text "22" at -3836.62,5457.5 h60
  text "10.00mil (0.254mm)" at -3246.78,5457.5 h60
  text "PTH" at -2127.11,5457.5 h60
  text "Round" at -1621.23,5457.5 h60
  text "Top Layer - Bottom Layer" at -887.43,5457.5 h60
  text "Via" at 612.12,5457.5 h60
  text "Rounded" at 1201.97,5457.5 h60
  text "v51h25m0mx0" at 1947.77,5457.5 h60
  text "128" at -3836.62,5307.5 h60
  text "12.00mil (0.305mm)" at -3246.78,5307.5 h60
  text "PTH" at -2127.11,5307.5 h60
  text "Round" at -1621.23,5307.5 h60
  text "Top Layer - Bottom Layer" at -887.43,5307.5 h60
  text "Via" at 612.12,5307.5 h60
  text "Rounded" at 1201.97,5307.5 h60
  text "(Mixed)" at 1947.77,5307.5 h60
  text "163 Total" at -3836.62,5157.5 h60
  text "'.Layer_Name'" at 16000,-9491 h150
DXF TOP:
  drawing of 11300 lines, arcs and shapes, not listed

## Dimensions
0,19.68 to 1437.01,59.05 on Dimensions
911.42,-88.58 to 1437.01,1515.75 on Dimensions

## Text inside footprints (layer, text, board x,y; h text height)
D1: Bottom Overlay "K" at 395,1047 h40; Bottom Component Outlines "K" at 414,978 h39.37
D2: Bottom Overlay "K" at 664,550 h20 r270
D3: Bottom Overlay "K" at 949,547 h20 r270
D6: Top Overlay "K" at 523,280 h30 r90; Top Component Outlines "K" at 488.94,284.43 h30 r270
D8: Bottom Overlay "K" at 805,549 h20 r270
D9: Bottom Overlay "K" at 1099,546 h30 r270
J3: Top Component Outlines "PCB EDGE" at 867.5,-107.5 h30 r180